# Altium PCB PCB1.PcbDoc
Units mm, origin at the board's own origin, x right, y up, seen from the top; angles counter-clockwise.
Board outline 115 x 40 mm, 2 copper layers (Top Layer, Bottom Layer); 88 components, 68 nets, 325 pads, 5 vias.
Unrouted connection lines stored in the file: 100.
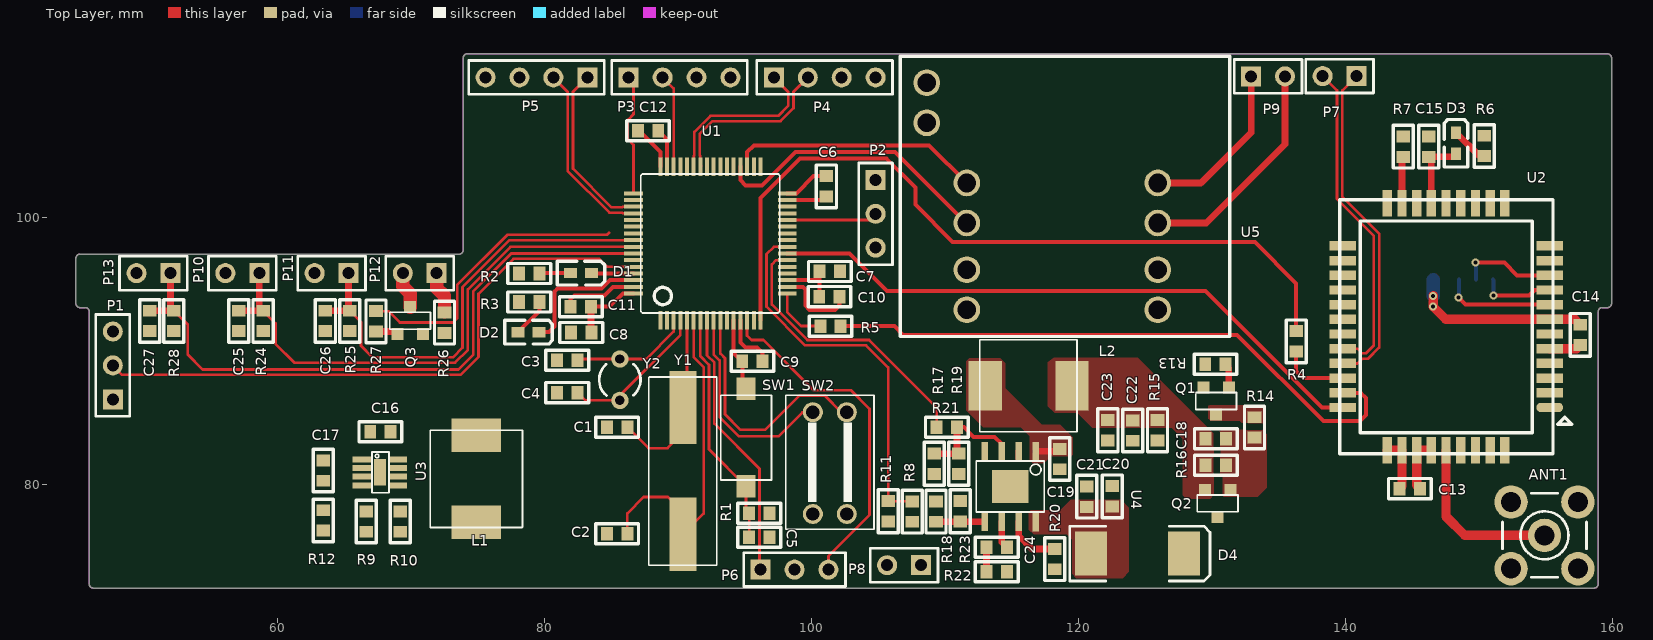
[diagram p0: Top Layer view]
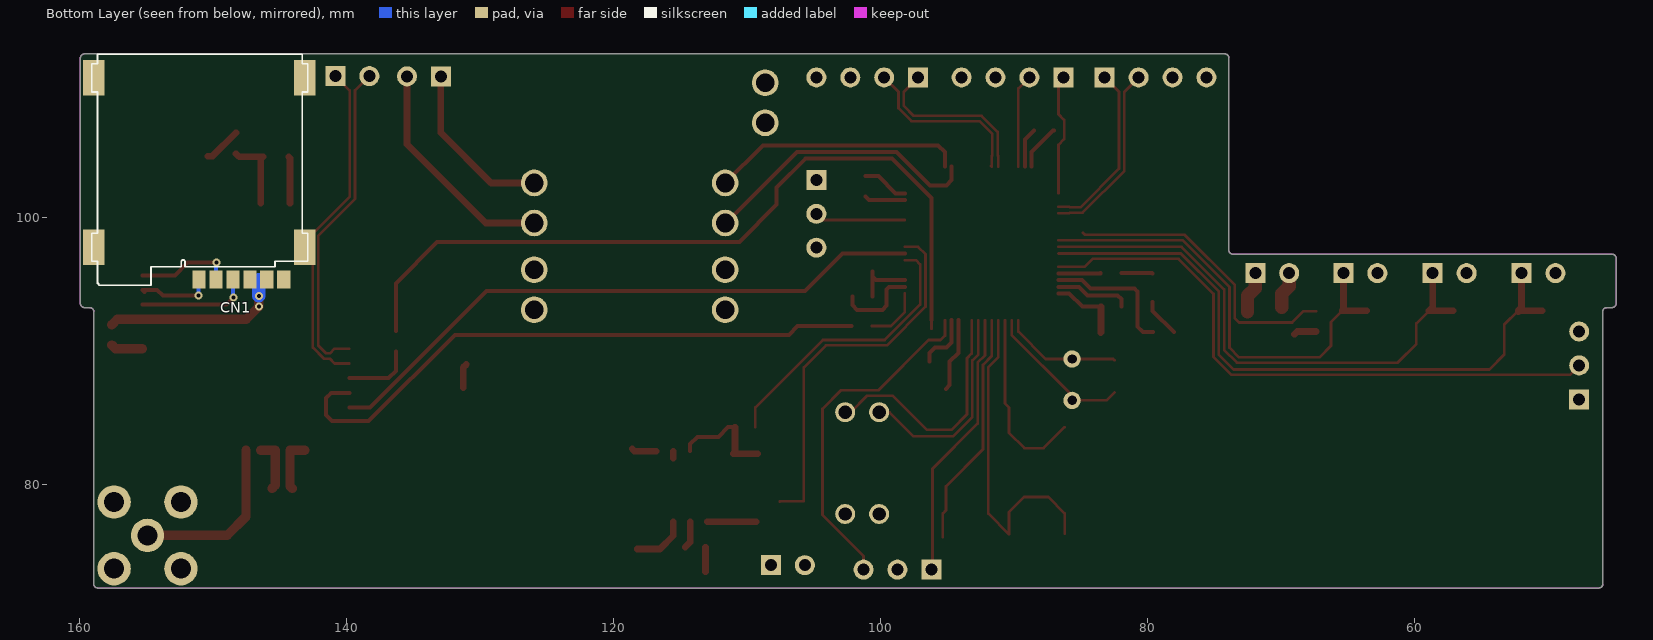
[diagram p1: Bottom Layer view, seen from below]

## Layer stack, top to bottom
Top Solder: solder mask 0.0102, Solder Resist, Dk 3.5
Top Layer: signal copper 0.0356
Dielectric 1: dielectric 0.32, FR-4, Dk 4.8
Bottom Layer: signal copper 0.0356
Bottom Solder: solder mask 0.0102, Solder Resist, Dk 3.5

## Board outline
45.913,92.954 ccw(c45.613,92.954) 45.613,93.254 45.213,93.254 cw(c45.213,93.554) 44.913,93.554 44.913,96.954 cw(c45.213,96.954) 45.213,97.254 73.613,97.254 ccw(c73.613,97.554) 73.913,97.554 73.913,111.954 cw(c74.213,111.954) 74.213,112.254 159.613,112.254 cw(c159.613,111.954) 159.913,111.954 159.913,93.554 cw(c159.613,93.554) 159.613,93.254 159.213,93.254 ccw(c159.213,92.954) 158.913,92.954 158.913,72.554 cw(c158.613,72.554) 158.613,72.254 46.213,72.254 cw(c46.213,72.554) 45.913,72.554

## Design rules (kind name [scope] priority, off if disabled: settings)
Clearance Clearance_1 [InPoly] p1: gap=0.5 ignorepadtopadclearanceinfootprint=FALSE
Clearance [All] p2: gap=0.2 ignorepadtopadclearanceinfootprint=FALSE
DiffPairsRouting d3 [All] p1: maxlimit=0.2 minlimit=0.2 mostfreqgap=0.2 toplayer_minwidth=0.2 toplayer_maxwidth=0.2 toplayer_prefwidth=0.2 bottomlayer_minwidth=0.2 bottomlayer_maxwidth=0.2 bottomlayer_prefwidth=0.2 maxuncoupledlength=12.7
DiffPairsRouting D1 [All] p2: maxlimit=0.2 minlimit=0.2 mostfreqgap=0.2 toplayer_minwidth=0.2 toplayer_maxwidth=0.2 toplayer_prefwidth=0.2 bottomlayer_minwidth=0.2 bottomlayer_maxwidth=0.2 bottomlayer_prefwidth=0.2 maxuncoupledlength=12.7
DiffPairsRouting d2 [All] p3: maxlimit=0.2 minlimit=0.2 mostfreqgap=0.2 toplayer_minwidth=0.2 toplayer_maxwidth=0.2 toplayer_prefwidth=0.2 bottomlayer_minwidth=0.2 bottomlayer_maxwidth=0.2 bottomlayer_prefwidth=0.2 maxuncoupledlength=12.7
DiffPairsRouting [All] p4: maxlimit=0.254 minlimit=0.254 mostfreqgap=0.254 toplayer_minwidth=0.381 toplayer_maxwidth=0.381 toplayer_prefwidth=0.381 bottomlayer_minwidth=0.381 bottomlayer_maxwidth=0.381 bottomlayer_prefwidth=0.381 maxuncoupledlength=12.7
MatchedLengths DiffPair_MatchedLengths [All] p1: tolerance=25.4 checknetsindiffpair=FALSE checkdiffpairvsdiffpair=TRUE checkxsignals=TRUE checkothers=TRUE
MatchedLengths DiffPair_MatchedLengths_1 [All] p2: tolerance=25.4 checknetsindiffpair=FALSE checkdiffpairvsdiffpair=TRUE checkxsignals=TRUE checkothers=TRUE
MatchedLengths DiffPair_MatchedLengths_2 [All] p3: tolerance=25.4 checknetsindiffpair=FALSE checkdiffpairvsdiffpair=TRUE checkxsignals=TRUE checkothers=TRUE
PolygonConnect [All] p1: connectstyle=Direct reliefconductorwidth=0.254 reliefentries=4 polygonreliefangle="90 Angle" airgapwidth=0.254
RoutingVias [All] p1: holewidth=0.3 width=0.6 viastyle="Through Hole" minholewidth=0.3 minwidth=0.6 maxholewidth=0.8 maxwidth=1.27
SilkToSilkClearance [All] p1: silktosilkclearance=0
SilkToSolderMaskClearance [IsPad] p1: minsilkscreentomaskgap=0.01 clearancetoexposedcopper=TRUE
SolderMaskExpansion [All] p1: expansion=0.102
Width [All] p1: maxlimit=2 minlimit=0.2 preferedwidth=0.5
27 further rules are at their usual default settings.

## Classes and differential pairs
component class GPRS: ANT1 C13 C14 C15 CN1 D3 P7 R6 R7 U2
component class U_DK_MOTO: C25 C26 C27 P9 P10 P11 P12 P13 Q3 R24 R25 R26 R28 U5
component class U_DK_POWER: C16 C17 C18 C19 C20 C21 C22 C23 C24 D4 L1 P8 Q1 Q2 R8 R9 R10 R11 R12 R13 R14 R15 R16 R17 R18 R19 R20 R21 R22 R23 U3 U4
component class U_DK_STM32L151: C1 C2 C3 C4 C5 C6 C7 C8 C9 C10 C11 C12 D1 D2 P1 P2 P3 P4 P5 P6 R1 R2 R3 R4 SW1 SW2 U1 Y1 Y2
differential pair RX1: +RX3 -TX3
differential pair MCU: +MCU_RX1 -MCU_TX1
differential pair GPRS: +GPRS_RX2 -GPRS_TX2

## Components (designator, comment, footprint, x,y, rotation, side; value= is the part's Value field where it differs from the comment)
ANT1 "SMB" SMB_V-RJ45 154.889,76.2 r90 top
C1 "Cap" 0603 84.684,84.303 r0 top value=22pF
C2 "Cap" 0603 84.684,76.327 r0 top value=22pF
C3 "Cap" 0603 80.95,89.306 r0 top value=10pF
C4 "Cap" 0603 80.95,86.893 r0 top value=10pF
C5 "Cap" 0603 95.326,76.048 r0 top value=0.1uF
C6 "Cap" 0603 101.117,101.575 r90 top value=100nF
C7 "Cap" 0603 102.133,95.961 r180 top locked value=100nF
C8 "Cap" 0603 81.991,91.389 r0 top value=100nF
C9 "Cap" 0603 94.818,89.23 r0 top value=100nF
C10 "Cap" 0603 102.108,94.082 r180 top value=10uF
C11 "Cap" 0603 81.966,93.32 r0 top value=100nF
C12 "NC" 0603 88.519,106.502 r180 top value=10uF
C13 "Cap2" 0603 144.043,79.705 r0 top value=100uF/6.6V
C14 "Cap" 0603 157.556,90.449 r90 top value=10uF
C15 "Cap" 0603 146.228,106.071 r270 top value=100nF
C16 "Cap" 0603 66.954,83.947 r0 top value=4.7uF
C17 "Cap" 0603 63.449,81.813 r270 top value=4.7uF
C18 "Cap" 0603 129.515,83.439 r0 top value=2.2uF
C19 "Cap" 0603 118.593,82.677 r270 top value=0.1uF
C20 "Cap" 0603 122.53,79.883 r270 top value=10uF
C21 "Cap" 0603 120.599,79.858 r270 top value=10uF
C22 "Cap" 0603 124.054,83.287 r90 top value=22uF
C23 "Cap" 0603 122.199,83.312 r90 top value=22uF
C24 "Cap" 0603 114.63,75.311 r180 top value=2.7nF
C25 "Cap" 0603 57.099,91.491 r90 top value=0.1uF
C26 "Cap" 0603 63.602,91.491 r90 top value=0.1uF
C27 "Cap" 0603 50.444,91.491 r90 top value=0.1uF
CN1 "SIM_BLOCK" SIM_BLOCK 144.678,95.352 r0 bottom locked
D1 "LED0" LED0603 81.94,95.834 r0 top
D2 "LED0" LED0603 78.029,91.415 r0 top locked
D3 "LED GREEN" LED0603 148.26,104.775 r90 top
D4 "Diode" SMC 124.414,74.828 r0 top
L1 "Inductor" 0630 74.905,77.191 r90 top value=22uH
L2 "Inductor" 0630 113.005,87.401 r0 top locked value=4.7uH
P1 "BOOT0" HDR1X3 47.676,86.385 r90 top
P2 "BOOT1" HDR1X3 104.8,102.819 r270 top
P3 "SWD" HDR1X4 86.309,110.49 r0 top locked
P4 "UART1" HDR1X4 97.18,110.49 r0 top locked
P5 "UART3" HDR1X4 83.21,110.49 r180 top locked
P6 "Header 3" HDR1X3 96.19,73.635 r0 top
P7 "Header 2" HDR1X2 140.818,110.592 r180 top
P8 "BATT" HDR1X2 108.204,73.965 r180 top
P9 "MOTOR" HDR1X2 132.918,110.566 r0 top
P10 "L_OFF" HDR1X2 58.649,95.834 r180 top locked
P11 "L_ON" HDR1X2 65.329,95.834 r180 top locked
P12 "BELL" HDR1X2 71.933,95.834 r180 top locked
P13 "BUTTON" HDR1X2 51.994,95.834 r180 top locked
Q1 "MOSFET-N" sot-23 130.302,86.258 r180 top
Q2 "MOSFET-P" sot-23 130.419,78.594 r180 top
Q3 "NPN" SOT-23 69.941,92.272 r0 top
R1 "Res2" 0603 96.85,77.851 r180 top value=10K
R2 "Res2" 0603 79.629,95.809 r180 top value=1K
R3 "Res2" 0603 79.629,93.675 r180 top value=1K
R4 "Res2" 0603 136.296,89.967 r90 top value=3K
R5 "Res2" 0603 102.184,91.872 r180 top locked value=100R
R6 "Res2" 0603 150.368,104.597 r90 top value=1K
R7 "NC" 0603 144.323,104.547 r90 top value=0
R8 "Res2" 0603 107.544,78.74 r270 top value="30K %1"
R9 "Res2" 0603 66.66,77.994 r270 top value=300K
R10 "Res2" 0603 69.2,77.994 r270 top value=100K
R11 "Res2" 0603 105.74,78.765 r270 top value="10K %1"
R12 "Res2" 0603 63.449,78.08 r270 top value=100K
R13 "Res2" 0603 131.013,89.002 r180 top value=1K
R14 "Res2" 0603 133.172,83.515 r90 top value=10K
R15 "NC" 0603 125.908,84.836 r270 top value=0
R16 "Res2" 0603 129.515,81.458 r0 top value=100K
R17 "NC" 0603 109.195,82.321 r270 top value=0
R18 "Res2" 0603 109.322,77.216 r90 top value="91K 1%"
R19 "Res2" 0603 111.023,80.797 r90 top value=10K
R20 "Res2" 0603 118.212,73.66 r90 top value=137K
R21 "Res2" 0603 109.372,84.303 r0 top value=0
R22 "Res2" 0603 114.63,73.482 r180 top value=13K
R23 "Res2" 0603 111.15,78.765 r270 top value="24K 1%"
R24 "Res2" 0603 58.928,93.015 r270 top value=10K
R25 "Res2" 0603 65.43,93.015 r270 top value=10K
R26 "Res2" 0603 72.517,92.888 r270 top value=0
R27 "Res2" 0603 67.386,92.989 r270 top value=1K
R28 "Res2" 0603 52.248,93.015 r270 top value=10K
SW1 "SW-PB" 3*6*4.3 95.098,83.523 r90 top locked
SW2 "SW DIP-2" SW-2*4 101.371,81.61 r0 top
U1 "STM32L151RCT6" LQFP64 92.425,98.06 r0 top locked
U2 "GU906" HFY_QFN_42_DTU 155.53,82.317 r180 top locked
U3 "TPS62120" TPS62120 66.326,81.89 r270 top
U4 "RT7272B" RT7272B 116.789,82.508 r180 top
U5 "MOTO" moto 106.633,91.091 r0 top locked
Y1 "8M" SMT-OSC 90.373,85.776 r270 top locked
Y2 "32.768M" R38 85.649,87.859 r0 top

## Footprints (in the part's own frame and the unit in brackets; to place one, negate y for a bottom-side part, rotate by r counter-clockwise, add the part's x,y. Pads: shape width x height; smd on the part's side, far side on the other; paste and mask are expansions set on the pad)
3*6*4.3 [mm]
  rect 1.7x1.4 smd: 1(-3.65,0) 2(3.65,0)
  silkscreen extent -3.17,-1.91 3.17,1.91
0603 [mil]
  rect 35x40 smd: 1(0,0) 2(60,0)
  silkscreen extent -33,-30 93,30
0630 [mm]
  rect 2.5x3.7 smd: 1(0,0) 2(6.5,0)
  silkscreen extent -0.41,-3.45 6.88,3.45
HDR1X2 [mm] "Connector; Header; 2 Position"
  rect 1.5x1.5 hole 0.9: 1(0,0)
  round 1.5 hole 0.9: 2(2.54,0)
  silkscreen extent -1.27,-1.27 3.81,1.27
HDR1X3 [mm] "Connector; Header; 3 Position"
  rect 1.5x1.5 hole 0.9: 1(0,0)
  round 1.5 hole 0.9: 2(2.54,0) 3(5.08,0)
  silkscreen extent -1.27,-1.27 6.35,1.27
HDR1X4 [mm] "Connector; Header; 4 Position"
  rect 1.5x1.5 hole 0.9: 1(0,0)
  round 1.5 hole 0.9: 2(2.54,0) 3(5.08,0) 4(7.62,0)
  silkscreen extent -1.27,-1.27 8.89,1.27
HFY_QFN_42_DTU [mm]
  oval 2x0.7 smd: 1(0.25,-3.459)
  rect 2x0.7 smd: 2(0.25,-4.559) 3(0.25,-5.659) 4(0.25,-6.759) 5(0.25,-7.859) 6(0.25,-8.959) 7(0.25,-10.059) 8(0.25,-11.159) 9(0.25,-12.259) 10(0.25,-13.359) 11(0.25,-14.459) 12(0.25,-15.559) 22(15.75,-15.559) 23(15.75,-14.459) 24(15.75,-13.359) 25(15.75,-12.259) 26(15.75,-11.159) 27(15.75,-10.059) 28(15.75,-8.959) 29(15.75,-7.859) 30(15.75,-6.759) 31(15.75,-5.659) 32(15.75,-4.559) 33(15.75,-3.459)
  rect 0.7x2 smd: 13(3.612,-18.75) 14(4.712,-18.75) 15(5.812,-18.75) 16(6.912,-18.75) 17(8.012,-18.75) 18(9.112,-18.75) 19(10.212,-18.75) 20(11.312,-18.75) 21(12.412,-18.75) 34(12.412,-0.25) 35(11.312,-0.25) 36(10.212,-0.25) 37(9.112,-0.25) 38(8.012,-0.25) 39(6.912,-0.25) 40(5.812,-0.25) 41(4.712,-0.25) 42(3.612,-0.25)
  silkscreen extent -1.42,-19.01 15.99,0
LED0603 [mil]
  rect 38x30 smd: 1(0,0) 2(62,0)
  silkscreen extent -39,-35 101,35
LQFP64 [mm]
  rect 0.3x1.4 smd: 1(-3.75,-5.75) 2(-3.25,-5.75) 3(-2.75,-5.75) 4(-2.25,-5.75) 5(-1.75,-5.75) 6(-1.25,-5.75) 7(-0.75,-5.75) 8(-0.25,-5.75) 9(0.25,-5.75) 10(0.75,-5.75) 11(1.25,-5.75) 12(1.75,-5.75) 13(2.25,-5.75) 14(2.75,-5.75) 15(3.25,-5.75) 16(3.75,-5.75) 33(3.75,5.75) 34(3.25,5.75) 35(2.75,5.75) 36(2.25,5.75) 37(1.75,5.75) 38(1.25,5.75) 39(0.75,5.75) 40(0.25,5.75) 41(-0.25,5.75) 42(-0.75,5.75) 43(-1.25,5.75) 44(-1.75,5.75) 45(-2.25,5.75) 46(-2.75,5.75) 47(-3.25,5.75) 48(-3.75,5.75)
  rect 1.4x0.3 smd: 17(5.75,-3.75) 18(5.75,-3.25) 19(5.75,-2.75) 20(5.75,-2.25) 21(5.75,-1.75) 22(5.75,-1.25) 23(5.75,-0.75) 24(5.75,-0.25) 25(5.75,0.25) 26(5.75,0.75) 27(5.75,1.25) 28(5.75,1.75) 29(5.75,2.25) 30(5.75,2.75) 31(5.75,3.25) 32(5.75,3.75) 49(-5.75,3.75) 50(-5.75,3.25) 51(-5.75,2.75) 52(-5.75,2.25) 53(-5.75,1.75) 54(-5.75,1.25) 55(-5.75,0.75) 56(-5.75,0.25) 57(-5.75,-0.25) 58(-5.75,-0.75) 59(-5.75,-1.25) 60(-5.75,-1.75) 61(-5.75,-2.25) 62(-5.75,-2.75) 63(-5.75,-3.25) 64(-5.75,-3.75)
  silkscreen extent -5.21,-5.21 5.21,5.21
moto [mm]
  round 2 hole 1.4: 1(2,19) 2(5,11.5) 3(5,8.5) 4(5,5) 5(5,2) 6(19.3,2) 7(19.3,5) 8(19.3,8.5) 9(19.3,11.5) 10(2,16)
  silkscreen extent 0,0 24.7,21
R38 [mm] "Crystal, Thru-Hole; 2 Leads; Body 3.1 x 8.2 mm (Dia.xH)"
  round 1.3 hole 0.7: 1(0,1.55) 2(0,-1.55)
  silkscreen extent -1.55,-1.19 1.55,1.17
RT7272B [mm]
  rect 0.5x1.4 smd: 1(0,0) 2(1.27,0) 3(2.54,0) 4(3.81,0) 5(3.81,5.3) 6(2.54,5.3) 7(1.27,5.3) 8(0,5.304)
  rect 2.7x2.5 smd: 9(1.905,2.65)
  silkscreen extent -0.64,0.74 4.44,4.55
SIM_BLOCK [mm]
  rect 1x1.35 smd: C1(1.27,0) C2(3.81,0) C3(6.35,0) C5(0,0) C6(2.54,0) C7(5.08,0)
  rect 1.6x2.65 smd: C4(-1.575,-2.413) C8(-1.575,-15.113) C9(14.249,-15.113) C10(14.249,-2.413)
  silkscreen extent -1.79,-16.87 14.39,0.41
SMB_V-RJ45 [mm] "Connector; SMB Straight"
  round 2.5 hole 1.5: 1(0,0) 2(-2.5,-2.5) 2(-2.5,2.5) 2(2.5,-2.5) 2(2.5,2.5)
  silkscreen extent -3.15,-3.15 3.15,3.15
SMC [mm] "DO-214-AB/SMC; 2 C-Bend Leads; Body 7.9 x 5.9 mm, inc. leads (LxW)"
  rect 2.4x3.3 smd: 1(-3.475,0) 2(3.475,0)
  silkscreen extent -5.07,-2.05 5.43,2.05
SMT-OSC [mm]
  rect 5.5x2 smd: 1(0,0) 2(9.5,0)
  silkscreen extent -2.29,-2.57 11.81,2.54
sot-23 [mm]
  rect 0.9x0.9 smd: 1(-0.95,-1.01) 2(0.95,-1.01) 3(0,1.01)
  silkscreen extent -1.52,-0.64 1.52,0.64
SOT-23 [mm]
  rect 0.9x0.9 smd: 1(-0.95,-1.01) 2(0.95,-1.01) 3(0,1.01)
  silkscreen extent -1.52,-0.64 1.52,0.64
SW-2*4 [mm]
  round 1.5 hole 1: 1(-1.27,-3.81) 2(1.27,-3.81) 3(1.27,3.81) 4(-1.27,3.81)
  silkscreen extent -3.3,-4.95 3.3,5.08
TPS62120 [mm]
  rect 0.45x1.4 smd: 1(0,0) 2(0.65,0) 3(1.3,0) 4(1.95,0) 5(1.95,2.7) 6(1.3,2.7) 7(0.65,2.7) 8(0,2.7)
  rect 2x0.9 smd: 9(0.975,1.35)
  silkscreen extent -0.55,0.76 2.5,2.03

## Part data
ANT1: "SMB Straight Connector", LatestRevisionDate=17-Jul-2002, LatestRevisionNote="Re-released for DXP Platform.", Publisher="Altium Limited"
C1 C2 C3 C4 C5 C6 C7 C8 C9 C10 C11 C13 C14 C15 C16 C17 C18 C19 C20 C21 C22 C23 C24 C25 C26 C27: "Capacitor", Publisher="Altium Limited"
  C1 C2 C3 C4 C5 C6 C7 C8 C9 C10 C11 C14 C15 C16 C17 C18 C19 C20 C21 C22 C23 C24 C25 C26 C27: LatestRevisionDate=17-Jul-2002, LatestRevisionNote="Re-released for DXP Platform.", PackageDescription="Radial Cap, Thru-Hole; 2 Leads; 0.3 in Pin Spacing", PackageReference=RAD-0.3, Published=8-Jun-2000
  C13: PackageDescription="Capacitor; 2 Leads", PackageReference=CAPR5-4X5, Published=23-Sep-2002
C12: library part Cap, "Capacitor", LatestRevisionDate=17-Jul-2002, LatestRevisionNote="Re-released for DXP Platform.", PackageDescription="Radial Cap, Thru-Hole; 2 Leads; 0.3 in Pin Spacing", PackageReference=RAD-0.3, Published=8-Jun-2000, Publisher="Altium Limited"
CN1: library part SIM_BLOCK_2
D1 D2: "Typical INFRARED GaAs LED", LatestRevisionDate=08-Jul-2005, LatestRevisionNote="Mech Layer 1 removed.", PackageDescription="LED; 2 Leads", PackageReference=LED-0, Published=8-Jun-2000, Publisher="Altium Limited"
D3: library part LED2, "Typical RED, GREEN, YELLOW, AMBER GaAs LED", LatestRevisionDate=17-Jul-2002, LatestRevisionNote="Re-released for DXP Platform.", PackageDescription="SM LED; 2 Flat Leads", PackageReference=3.2X1.6X1.1, PackageVersion=Feb-2002, Published=8-Jun-2000, Publisher="Altium Limited"
D4: "Default Diode", Code_JEDEC=DO-214-AB, LatestRevisionDate=17-Jul-2002, LatestRevisionNote="Re-released for DXP Platform.", PackageDescription="DO-214-AB/SMC; 2 C-Bend Leads; Body 7.9 x 5.9 mm, inc. leads (LxW)", PackageReference=SMC, PackageVersion=Sep-1996, Published=8-Jun-2000, Publisher="Altium Limited"
P1 P2: library part "Header 3", "Header, 3-Pin", LatestRevisionDate=17-Jul-2002, LatestRevisionNote="Re-released for DXP Platform.", Publisher="Altium Limited"
P3 P4 P5: library part "Header 4", "Header, 4-Pin", LatestRevisionDate=17-Jul-2002, LatestRevisionNote="Re-released for DXP Platform.", Publisher="Altium Limited"
P6: "Header, 3-Pin", LatestRevisionDate=17-Jul-2002, LatestRevisionNote="Re-released for DXP Platform.", Publisher="Altium Limited"
P7: "Header, 2-Pin", LatestRevisionDate=17-Jul-2002, LatestRevisionNote="Re-released for DXP Platform.", Publisher="Altium Limited"
P8 P9 P10 P11 P12 P13: library part "Header 2", "Header, 2-Pin", LatestRevisionDate=17-Jul-2002, LatestRevisionNote="Re-released for DXP Platform.", Publisher="Altium Limited"
Q1: library part NMOS-2, "N-Channel Power MOSFET", ComponentLink1Description="Manufacturer Link", ComponentLink1URL=http://www.irf.com/, DatasheetVersion=PD-9.814, LatestRevisionDate=17-Jul-2002, LatestRevisionNote="Re-released for DXP Platform.", Note="Pin 2 is electrically connected to pin 4.", PackageDescription="TO, Thru-Hole, Vertical, Heatsink Mounted; 3 In-Line Leads; Pitch 2.54 mm", PackageReference=TO-220AB, PackageVersion=Feb-1997, Published=8-Jun-2000, Publisher="Altium Limited"
Q2: library part PMOS-2, "P-Channel Power MOSFET", ComponentLink1Description="Manufacturer Link", ComponentLink1URL=http://www.irf.com/, DatasheetVersion=PD-9.390D, LatestRevisionDate=17-Jul-2002, LatestRevisionNote="Re-released for DXP Platform.", Note="Pin 4 not drawn and electrically connected to Pin 2.", PackageDescription="TO, Thru-Hole, Vertical, Heatsink Mounted; 3 In-Line Leads; Pitch 2.54 mm", PackageReference=TO-220AB, PackageVersion=Feb-1997, Published=8-Jun-2000, Publisher="Altium Limited"
Q3: "NPN Bipolar Transistor", Code_JEDEC=TO-226-AA, LatestRevisionDate=17-Jul-2002, LatestRevisionNote="Re-released for DXP Platform.", PackageDescription="TO, Flat Index; 3 In-Line, Axial Leads; Body Dia. 4.8mm; Leads 0.55 x 0.51 mm (max)", PackageReference=TO-226-AA, Published=8-Jun-2000, Publisher="Altium Limited"
R1 R2 R3 R4 R5 R6 R8 R9 R10 R11 R12 R13 R14 R16 R18 R19 R20 R21 R22 R23 R24 R25 R26 R27 R28: "Resistor", LatestRevisionDate=17-Jul-2002, LatestRevisionNote="Re-released for DXP Platform.", PackageDescription="Axial Device, Thru-Hole; 2 Leads; 0.4 in Pin Spacing", PackageReference=AXIAL-0.4, Published=8-Jun-2000, Publisher="Altium Limited"
R7 R15 R17: library part Res2, "Resistor", LatestRevisionDate=17-Jul-2002, LatestRevisionNote="Re-released for DXP Platform.", PackageDescription="Axial Device, Thru-Hole; 2 Leads; 0.4 in Pin Spacing", PackageReference=AXIAL-0.4, Published=8-Jun-2000, Publisher="Altium Limited"
SW1: "Switch", LatestRevisionDate=17-Jul-2002, LatestRevisionNote="Re-released for DXP Platform.", PackageDescription="Switch; 2 Leads", PackageReference=SPST-2, Published=24-Mar-1999, Publisher="Altium Limited"
SW2: "DIP Switch, 2 Position, SPST", LatestRevisionDate=17-Jul-2002, LatestRevisionNote="Re-released for DXP Platform.", PackageReference=DIP-4, Published=24-Mar-1999, Publisher="Altium Limited"
U1: "ARM Cortex-M3 32-bit MCU, 256 KB Flash, 32 KB Internal RAM, 51 I/Os, 64-pin LQFP, -40 to 85 degC, Tray", I/Os (High Current)=51, Manufacturer=STMicroelectronics, Operating Frequency(F) (Processor speed) (MHz)=32, Supply Voltage(Vcc) min (V)=1.65, ComponentLink1Description="Manufacturer URL", ComponentLink1URL=http://www.st.com/web/en/home.html, ComponentLink2Description=Datasheet, ComponentLink2URL=http://www.st.com/st-web-ui/static/active/en/resource/technical/document/datasheet/DM00048356.pdf, ComponentLink3Description="Package Specification", ComponentLink3URL=http://www.st.com/st-web-ui/static/active/en/resource/technical/document/datasheet/DM00037051.pdf, Core="ARM Cortex-M3", D/A Converter="2x12-bit (2 Channel)", Data E2PROM nom (B)=8192, DatasheetVersion="Rev. 3", FLASH Size (Prog) (kB)=256, Internal RAM Size (kB)=32, Mounting Technology="Surface Mount", PackageDescription="64-Pin Low Profile Quad Flat Package, 10 x 10 mm Body, 0.5 mm Pitch", PackageReference=LQFP64, PackageVersion="Rev. 4, 06/2013", Packing=Tray, PartNumber=STM32L151RCT6
U2: library part GU600_LIB_2
Y1 Y2: library part XTAL, "Crystal Oscillator", LatestRevisionDate=17-Jul-2002, LatestRevisionNote="Re-released for DXP Platform.", PackageDescription="Crystal, Thru-Hole; 2 Leads; Body 3.1 x 8.2 mm (Dia.xH)", PackageReference=R38, Published=8-Jun-2000, Publisher="Altium Limited"
L1 L2: Code_IEC=1005, Code_JEITA=0402, LatestRevisionDate=29-May-2009, LatestRevisionNote="IPC-7351 Footprint Added.", PackageDescription="Chip Inductor", PackageReference=0402-A, Published=8-Jun-2000, Publisher="Altium Limited"

## Via types
v1: diameter 0.6, hole 0.3, Top Layer to Bottom Layer, tented both sides, 5 vias

## Nets (pads, with @x,y where several pads share a name; then routed paths per layer and width w, separated by ;. In a path a pad name is that pad's centre, name@x,y a point inside that pad or via, vN(x,y) a via of type N, cw(c..) or ccw(c..) an arc to the next point about the centre after c; other vN are vias at no path point)
BATT: C17.2 C20.2 C21.2 D4.1 P8.1 R8.2 R17.2 R26.2 U3.1 U3.3 U4.8 U5.1
BOOT0: P1.2 U1.60 | length 45.9
  Top Layer w0.2: P1.2 48.381,88.221 73.724,88.221 75.06,89.557 75.06,94.288 77.682,96.91 84.116,96.91 84.716,96.31 U1.60
BOOT1: P2.2 U1.28 | length 6.8
  Top Layer w0.2: U1.28 104.331,99.81 P2.2
GND: ANT1.2 C1.1 C2.1 C3.1 C4.1 C5.2 C6.1 C7.1 C8.1 C9.1 C10.1 C11.1 C12.1 C13.2 C14.1 C15.1 C16.1 C17.1 C20.1 C21.1 C22.1 C23.1 C25.1 C26.1 C27.1 CN1.C4 CN1.C5 CN1.C8 CN1.C9 CN1.C10 P1.3 P2.3 P3.4 P4.4 P5.4 P8.2 P10.2 P11.2 P13.2 Q1.2 Q3.2 R6.2 R11.2 R12.1 R19.1 R20.1 R22.1 R23.1 SW1.2 U1.12 U1.18 U1.31 U1.47 U1.63 U2.5 U2.26 U2.28 U2.36 U2.37 U2.39 U2.40 U3.2 U4.4 U5.10 | length 29.8
  Top Layer w0.3: C11.1 81.966,93.904 82.24,94.178 84.496,94.178 85.128,94.81 U1.63 ; C12.1 89.175,105.846 U1.47 ; U1.12 94.175,89.873 C9.1 94.818,87.452 SW1.2 ; U1.18 99.348,94.81 99.543,94.615 99.543,93.396 99.847,93.091 101.752,93.091 102.108,93.447 C10.1 ; U1.31 100.853,101.31 C6.1
  Top Layer w0.7: C13.2 145.317,79.955 U2.36 U2.37 ; U2.5 157.282,90.175 C14.1
GPRS_PWR: R13.2 R21.1 U1.22 | length 21.3
  Top Layer w0.2: U1.22 97.343,96.81 97.025,96.492 97.025,93.493 99.688,90.83 104.318,90.83 109.372,85.776 R21.1
GPRS_RX2: P7.2 U2.29 | length 24.5
  Top Layer w0.2: P7.2 139.348,109.522 139.348,101.387 142.113,98.621 142.113,90.435 141.503,89.825 141.23,89.825 140.88,90.175 U2.29
GPRS_TX2: P7.1 U2.30 | length 25.1
  Top Layer w0.2: U2.30 140.88,89.075 141.23,89.425 141.669,89.425 142.513,90.269 142.513,98.787 139.748,101.552 139.748,109.522 P7.1
GSM_GPRS: C15.2 D3.1 U2.18 | length 5.7
  Top Layer w0.5: U2.18 146.417,104.357 C15.2 148.031,104.547 D3.1
L_OFF: C25.2 P10.1 R24.1 U1.57 | length 41.3
  Top Layer w0.2: R24.1 59.868,92.075 59.868,90.526 61.265,89.129 73.304,89.129 74.26,90.085 74.26,94.62 77.451,97.81 U1.57
  Top Layer w0.5: C25.2 R24.1 58.649,93.294 P10.1
L_ON: C26.2 P11.1 R25.1 U1.56 | length 34.7
  Top Layer w0.2: R25.1 66.269,92.177 66.269,90.399 67.139,89.529 73.139,89.529 73.86,90.25 73.86,94.785 77.385,98.31 U1.56
  Top Layer w0.5: C26.2 R25.1 65.329,93.116 P11.1
LED0: D1.2 U1.61 | length 3.2
  Top Layer w0.3: D1.2 83.515,95.81 U1.61
LED1: D2.2 U1.62 | length 10.2
  Top Layer w0.3: D2.2 80.34,91.415 80.772,91.846 80.772,94.463 80.987,94.678 84.289,94.678 84.921,95.31 U1.62
MCU_RX1: P4.1 U1.43 | length 13
  Top Layer w0.2: U1.43 91.175,104.61 91.225,104.66 91.225,106.421 92.424,107.62 97.511,107.62 98.25,108.36 98.25,109.42 P4.1
MCU_TX1: P4.2 U1.42 | length 13.1
  Top Layer w0.2: U1.42@91.725,103.86 U1.42 91.675,104.61 91.625,104.66 91.625,106.256 92.589,107.22 97.676,107.22 98.65,108.194 98.65,109.42 P4.2
MOTO1: U1.35 U5.2 | length 18.9
  Top Layer w0.3: U1.35 95.175,104.903 95.682,105.41 108.814,105.41 U5.2
MOTO2: U1.36 U5.3 | length 21.4
  Top Layer w0.3: U1.36 94.675,102.81 95.072,102.413 96.291,102.413 98.789,104.91 106.266,104.91 111.585,99.591 U5.3
MOTOR1: P9.1 U5.9 | length 12.8
  Top Layer w0.5: U5.9 129.159,102.591 132.918,106.35 P9.1
MOTOR2: P9.2 U5.8 | length 17
  Top Layer w0.5: U5.8 129.563,99.591 135.458,105.486 P9.2
NetANT1_1: ANT1.1 U2.38 | length 12.9
  Top Layer w0.7: U2.38 147.517,77.603 148.92,76.2 ANT1.1
NetC18_1: C18.1 C22.2 C23.2 L2.2 Q2.2 R15.1 R16.1 R18.2
NetC18_2: C18.2 Q2.1 R14.1 R16.2
NetC19_1: C19.1 L2.1 U4.1 | length 1.9
  Top Layer w0.5: U4.1 118.423,82.508 C19.1
NetC19_2: C19.2 D4.2 U4.2 | length 0.5
  Top Layer w0.5: U4.2@115.519,81.989 U4.2
NetC24_1: C24.1 U4.6 | length 2.1
  Top Layer w0.5: U4.6 114.249,75.692 C24.1
NetC24_2: C24.2 R22.2 | length 1.8
  Top Layer w0.5: R22.2 C24.2
NetD1_1: D1.1 R2.1 | length 2.4
  Top Layer w0.2: D1.1@81.915,95.809 D1.1
  Top Layer w0.3: R2.1 79.654,95.834 D1.1
NetD2_1: D2.1 R3.1 | length 2.9
  Top Layer w0.3: D2.1 79.629,93.015 R3.1
NetD3_2: D3.2 R6.1 | length 2.8
  Top Layer w0.5: D3.2 150.012,104.597 R6.1
NetL1_1: L1.1 U3.7
NetP12_1: P12.1 R26.1 | length 3.1
  Top Layer w1: P12.1 71.933,94.717 72.517,94.132 R26.1@72.517,92.943
NetP12_2: P12.2 Q3.3 | length 2.8
  Top Layer w1: P12.2 69.393,94.844 69.941,94.295 Q3.3
NetQ1_1: Q1.1 R13.1 | length 1.8
  Top Layer w0.5: R13.1 131.252,88.763 Q1.1
NetQ1_2: Q1.3 R14.2
NetQ3_2: Q3.1 R27.2 | length 1.7
  Top Layer w0.5: R27.2 68.788,91.465 Q3.1
NetR4_1: R4.1 U2.31 | length 5.2
  Top Layer w0.3: R4.1 136.296,88.519 136.84,87.975 U2.31
NetR4_2: R4.2 U1.16 | length 59.3
  Top Layer w0.2: U1.16@96.175,91.683 U1.16
  Top Layer w0.3: U1.16 96.175,101.458 99.127,104.41 105.597,104.41 107.772,102.235 107.772,100.965 110.566,98.171 133.198,98.171 136.296,95.072 R4.2
NetR5_1: R5.1 U2.32 | length 45.7
  Top Layer w0.3: R5.1 106.197,91.872 106.858,91.211 131.877,91.211 138.328,84.76 141.072,84.76 141.529,85.217 141.529,86.476 141.13,86.875 U2.32
NetR5_2: R5.2 U1.17 | length 4.3
  Top Layer w0.2: U1.17 98.175,92.909 99.212,91.872 R5.2
NetR7_1: R7.1 U2.20 | length 3.5
  Top Layer w0.5: U2.20 144.217,104.441 R7.1
NetR7_2: R7.2 U1.44
NetR8_1: R8.1 R11.1 U1.24 | length 28.5
  Top Layer w0.2: U1.24 97.175,97.81 96.625,97.26 96.625,93.328 99.522,90.43 104.083,90.43 105.74,88.773 R11.1 107.518,78.765 R8.1
NetR9_1: R9.1 R12.2 U3.5
NetR10_1: R10.1 U3.6
NetR17_1: R17.1 R19.2 R21.2 U4.3 | length 8.3
  Top Layer w0.3: R21.2 111.404,84.303 112.141,83.566 113.716,83.566 114.249,83.033 U4.3
  Top Layer w0.5: R17.1 R19.2 110.896,82.448 R21.2
NetR18_1: R18.1 R23.2 U4.5 | length 3.7
  Top Layer w0.5: R18.1 112.971,77.216 U4.5
NetR20_2: R20.2 U4.7 | length 4.1
  Top Layer w0.5: U4.7 115.519,76.175 116.51,75.184 R20.2
NetR27_1: R27.1 U1.30 | length 22
  Top Layer w0.2: R27.1 68.326,92.989 69.172,92.143 73.149,92.143 73.46,92.454 73.46,94.951 77.219,98.71 84.689,98.71 84.836,98.857
OSC32_IN: C3.2 U1.3 Y2.1 | length 8.9
  Top Layer w0.2: C3.2 82.576,89.409 Y2.1 87.631,89.409 89.675,91.453 U1.3
OSC32_OUT: C4.2 U1.4 Y2.2 | length 11.3
  Top Layer w0.2: C4.2 83.059,86.309 Y2.2 85.649,86.69 90.175,91.217 U1.4
OSC_IN: C1.2 U1.5 Y1.1 | length 13.9
  Top Layer w0.2: C1.2 87.782,82.728 89.23,82.728 90.373,83.871 Y1.1 90.675,86.078 U1.5
OSC_OUT: C2.2 U1.6 Y1.2 | length 25.3
  Top Layer w0.2: C2.2 86.208,77.851 87.427,79.07 89.256,79.07 90.373,77.953 Y1.2 91.923,77.825 91.923,88.798 91.175,89.546 U1.6
PA0: P6.3 U1.14 | length 25.9
  Top Layer w0.2: U1.14 95.175,91.159 95.504,90.83 96.393,90.83 100.159,87.065 102.953,87.065 104.343,85.674 104.343,77.724 101.27,74.651 P6.3
PC0: P6.1 U1.8 | length 20.6
  Top Layer w0.2: U1.8 92.175,89.677 92.723,89.13 92.723,84.569 96.106,81.186 96.106,73.719 P6.1 P6.1@96.342,73.787
PC1: SW2.4 U1.9 | length 15.4
  Top Layer w0.2: U1.9 92.675,89.743 93.123,89.295 93.123,85.058 94.564,83.617 97.536,83.617 99.314,85.395 SW2.4@99.72,85.395
PC2: SW2.3 U1.10 | length 18
  Top Layer w0.2: U1.10 93.175,89.809 93.523,89.461 93.523,85.268 94.691,84.099 96.52,84.099 99.085,86.665 100.99,86.665 SW2.3@102.26,85.395
PWON: U1.23 U2.33 | length 46.4
  Top Layer w0.3: U1.23 102.842,97.31 105.639,94.513 129.489,94.513 138.227,85.775 U2.33
RESET: C5.1 R1.2 SW1.1 U1.7 | length 17.8
  Top Layer w0.2: U1.7 91.675,89.611 92.323,88.964 92.323,82.648 SW1.1 95.098,78.08 R1.2 C5.1
RX3: P5.2 U1.52 | length 13.7
  Top Layer w0.2: P5.2 81.74,109.42 81.74,103.493 84.874,100.36 85.825,100.36 85.875,100.31 U1.52
SIM_CLK: CN1.C3 U2.9 | length 5.8
  Top Layer w0.3: v1(151.079,94.158) 153.746,94.158 154.164,94.575 U2.9 U2.9@155.116,94.412
  Bottom Layer w0.3: CN1.C3 151.079,95.301 v1(151.079,94.158)
SIM_DATA: CN1.C7 U2.10 | length 7.2
  Top Layer w0.3: v1(149.733,96.622) 151.892,96.622 152.838,95.675 U2.10
  Bottom Layer w0.3: v1(149.733,96.622) 149.758,96.596 CN1.C7
SIM_RST: CN1.C2 U2.8 | length 8.4
  Top Layer w0.3: v1(148.438,94.005) 148.968,93.475 U2.8
  Bottom Layer w0.3: v1(148.438,94.005) 148.488,94.056 CN1.C2
SIM_VCC: C14.2 CN1.C1 CN1.C6 U2.7 | length 13.6
  Top Layer w0.7: v1(146.558,94.132) v1(146.558,93.32) 147.502,92.375 U2.7 157.154,92.375 C14.2
  Bottom Layer w1: v1(146.558,94.132) 146.558,95.352
SW1: C27.2 P13.1 R28.1 U1.58 | length 48.8
  Top Layer w0.2: R28.1@52.248,92.939 R28.1 53.289,91.973 53.289,89.738 54.407,88.621 73.558,88.621 74.66,89.723 74.66,94.454 77.516,97.31 U1.58
  Top Layer w0.5: C27.2 52.172,93.015 R28.1@52.248,92.939 ; P13.1 51.994,93.269 R28.1
SWCLK: P3.1 U1.49 | length 9.2
  Top Layer w0.2: P3.1 86.675,110.124 86.675,107.735 86.251,107.31 86.251,105.87 86.675,105.445 U1.49
SWDIO: P3.2 U1.46 | length 7
  Top Layer w0.2: P3.2 89.675,109.664 U1.46
TX3: P5.1 U1.51 | length 13
  Top Layer w0.2: P5.1 82.14,109.42 82.14,103.659 85.039,100.76 85.825,100.76 85.875,100.81 U1.51
V3.3: C6.2 C7.2 C8.2 C9.2 C10.2 C11.2 C12.2 C16.2 L1.2 P1.1 P2.1 P3.3 P4.3 P5.3 R1.1 R2.2 R3.2 R9.2 R10.2 R24.2 R25.2 R28.2 SW2.1 SW2.2 U1.13 U1.19 U1.32 U1.48 U1.64 U3.4 U3.8 | length 21.2
  Top Layer w0.3: C11.2 84.887,93.32 85.877,94.31 U1.64 ; C12.2 87.071,106.502 88.675,104.898 U1.48 ; U1.13 94.675,90.643 95.047,90.272 95.91,90.272 96.342,89.84 C9.2 ; U1.19 100.339,95.31 C7.2@100.609,95.58 ; U1.32 98.863,101.81 100.152,103.099 C6.2 ; C10.2 100.609,94.107 C7.2@100.609,95.58 ; C7.2 C7.2@100.609,95.58
  Top Layer w0.5: C11.2 83.49,91.415 C8.2
V3.8: C13.1 Q2.3 R15.2 U2.34 U2.35 | length 4
  Top Layer w0.7: U2.34 U2.35 144.217,79.879 C13.1
pads on no net: P6.2 U1.1 U1.2 U1.11 U1.15 U1.20 U1.21 U1.25 U1.26 U1.27 U1.29 U1.33 U1.34 U1.37 U1.38 U1.39 U1.40 U1.41 U1.45 U1.50 U1.53 U1.54 U1.55 U1.59 U2.1 U2.2 U2.3 U2.4 U2.6 U2.11 U2.12 U2.13 U2.14 U2.15 U2.16 U2.17 U2.19 U2.21 U2.22 U2.23 U2.24 U2.25 U2.27 U2.41 U2.42 U3.9 U4.9 U5.4 U5.5 U5.6 U5.7

## Polygon pours and split planes (outlines as drawn)
NetC19_1 on Top Layer "Top Layer-No Net" (solid, pour order 8): 111.582,89.23 111.582,85.573 112.852,84.303 115.672,84.303 116.357,83.617 116.357,81.813 116.586,81.585 117.373,81.585 117.78,81.991 119.329,81.991 119.558,82.22 119.558,83.541 118.618,84.48 117.246,84.48 114.503,87.224 114.503,89.078 114.122,89.459 111.811,89.459
BATT on Top Layer "Top Layer-No Net" (solid, pour order 30): 116.408,78.08 118.618,78.08 119.405,78.867 123.19,78.867 123.774,78.283 123.774,73.482 123.292,73 119.837,73 119.507,73.33 119.507,75.87 119.101,76.276 116.637,76.276 116.256,76.657 116.256,77.826
NetQ1_2 on Top Layer "Top Layer-No Net" (solid, pour order 28): 129.819,85.954 133.756,85.954 133.985,85.725 133.985,84.709 133.833,84.557 132.309,84.557 132.08,84.785 129.845,84.785 129.718,84.912 129.718,85.903
NetC18_2 on Top Layer "Top Layer-No Net" (solid, pour order 18): 130.81,79.273 130.81,80.594 130.531,80.874 130.556,80.899 130.556,83.972 130.708,84.125 133.731,84.125 134.087,83.769 134.087,79.781 133.401,79.096 130.886,79.096 130.835,79.146
NetC18_1 on Top Layer "Top Layer-No Net" (solid, pour order 16): 118.135,89.51 124.435,89.51 130.124,83.82 130.124,79.223 129.845,78.943 128.041,78.943 127.787,79.197 127.787,83.439 126.975,84.252 121.031,84.252 119.888,85.395 119.863,85.369 118.212,85.369 117.704,85.877 117.704,89.179

## Keep-outs
Keep-Out Layer:
  the board outline again, w0.013